# EAGLE board PicoBuck_Panel_v12 (EAGLE 7.4.0), part 1 of 3
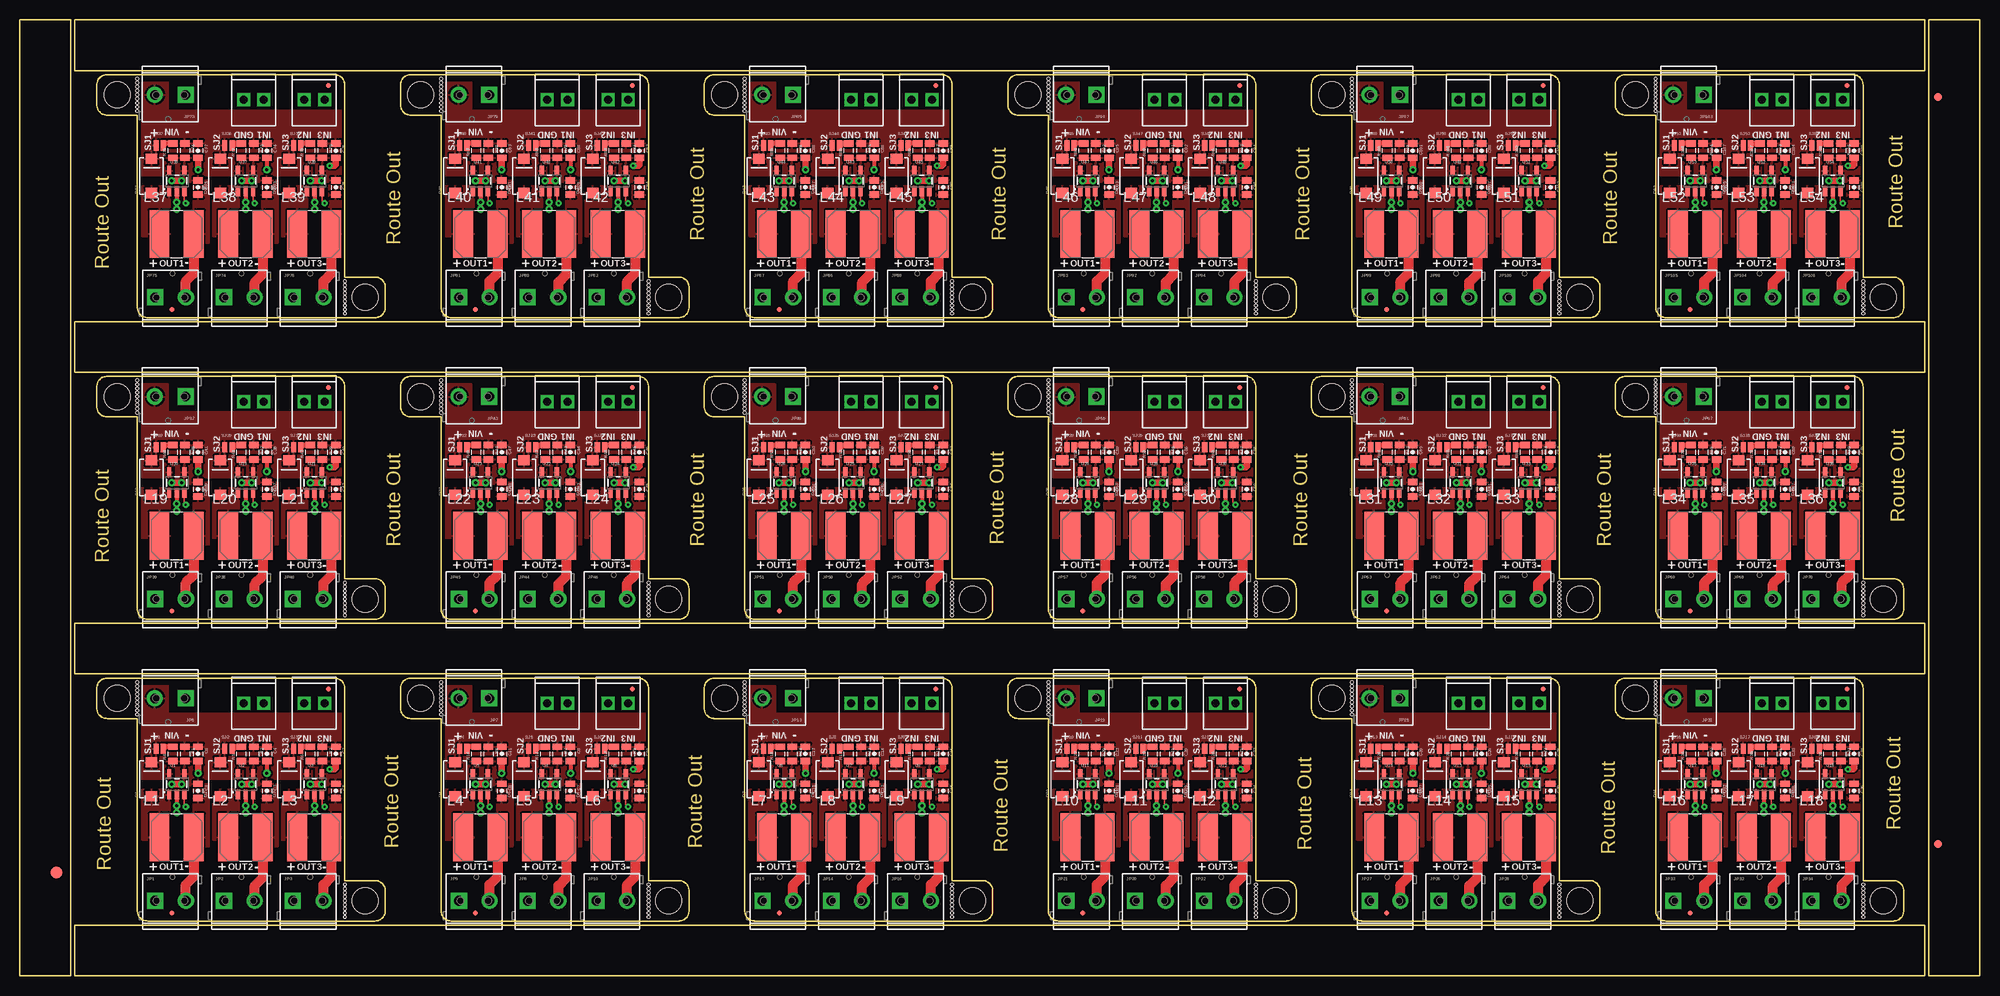
[diagram p0: board, top side]
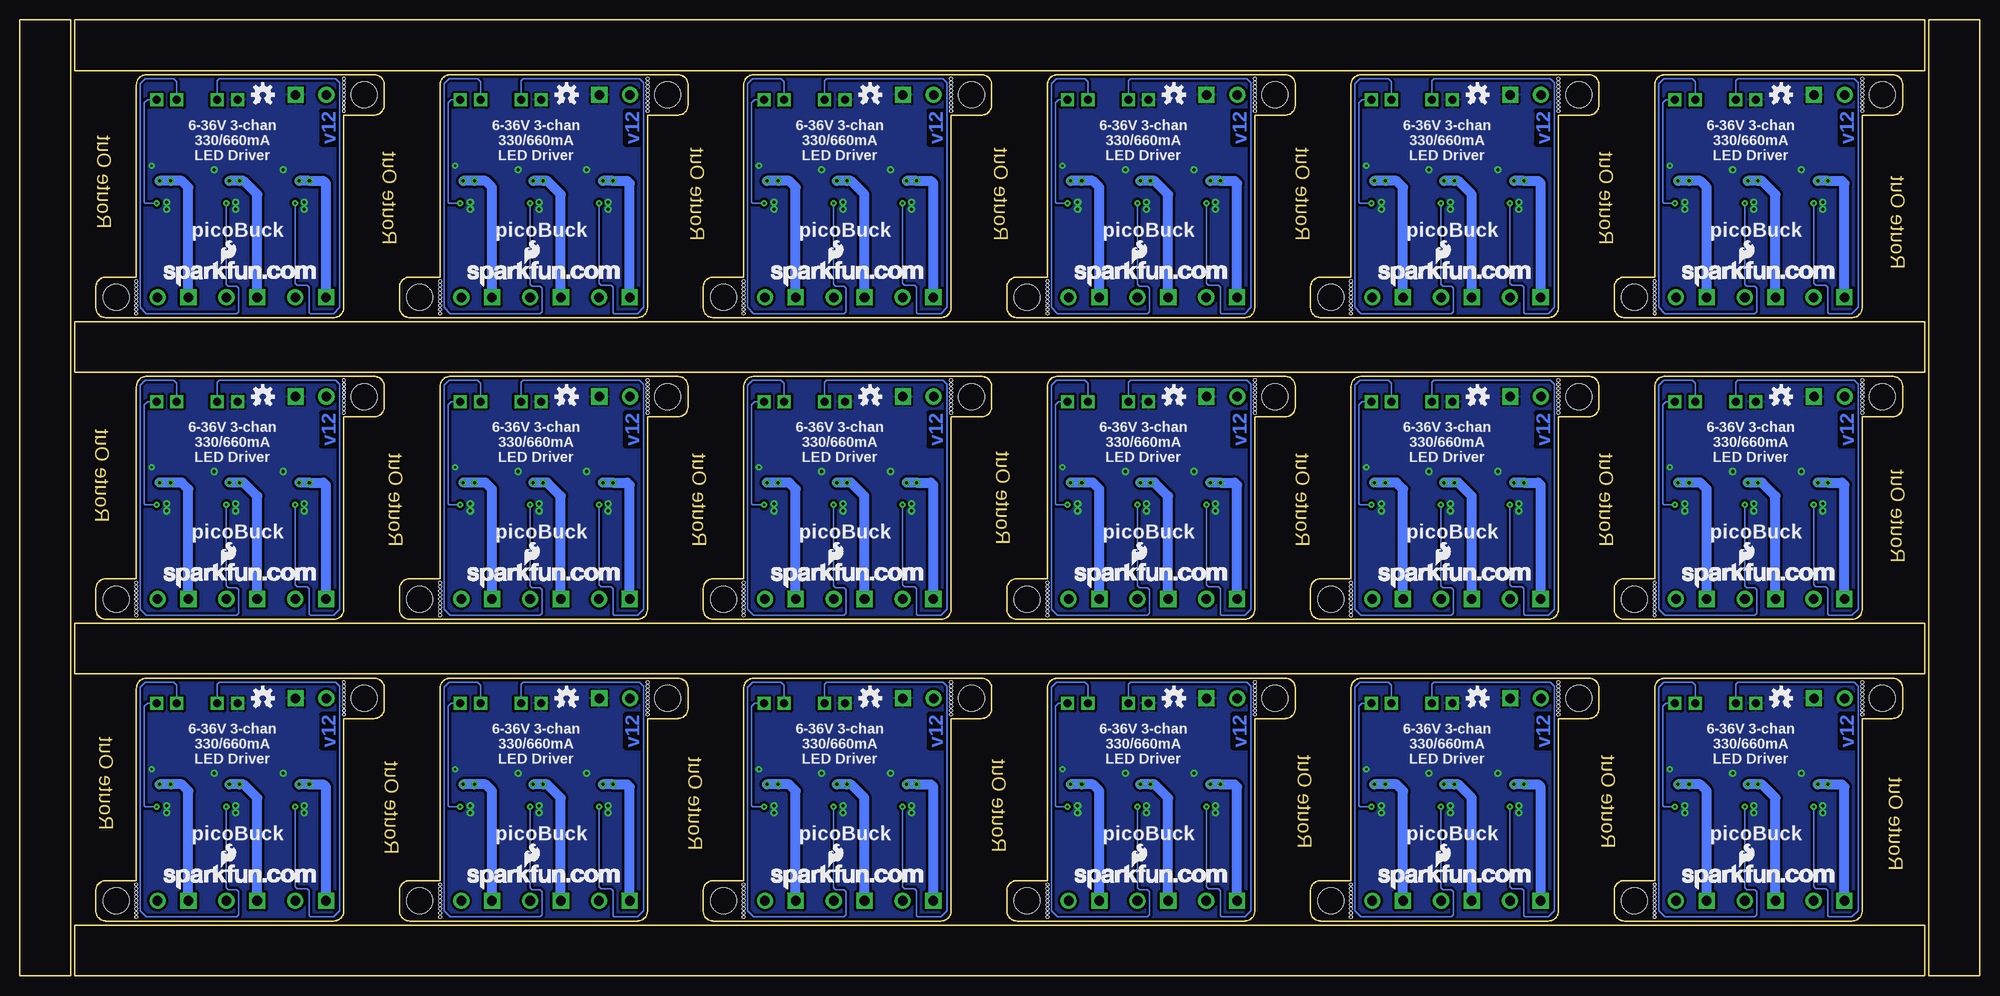
[diagram p1: board, bottom side, seen from below]

Size 245.87 x 119.89 mm. Coordinates in mm from the lower left corner, seen from the top.
Outline: 288 segments
Copper layers (1*16): Top 0.035mm / dielectric 1.5mm / Bottom 0.035mm
Design rules "SparkFun-2-layer": minimum track width 7mil, minimum drill 15mil, track to track 8mil, track to pad 8mil, pad to pad 8mil, via to via 8mil, smd to smd 8mil, copper to edge 8mil, drill to drill 8mil, minimum pad ring 12mil, minimum via ring 10mil, stop-mask expansion 4mil, vias tented up to drill 20mil, thermal gap 10mil
Net classes: 0 default: width 0.254 mm; 1 power: width 0.508 mm
Holes 0.38 mm at 40.77,11.43 40.77,10.92 40.77,10.41 40.77,9.91 40.77,9.4 40.77,8.89 40.77,8.38 40.77,7.87 40.77,7.37 14.73,36.83 14.73,36.32 14.73,35.81 14.73,35.31 14.73,34.8 14.73,34.29 14.73,33.78 14.73,33.27 14.73,32.77 78.87,11.43 78.87,10.92 78.87,10.41 78.87,9.91 78.87,9.4 78.87,8.89 78.87,8.38 78.87,7.87 78.87,7.37 52.83,36.83 52.83,36.32 52.83,35.81 52.83,35.31 52.83,34.8 52.83,34.29 52.83,33.78 52.83,33.27 52.83,32.77 116.97,11.43 116.97,10.92 116.97,10.41 116.97,9.91 116.97,9.4 116.97,8.89 116.97,8.38 116.97,7.87 116.97,7.37 90.93,36.83 90.93,36.32 90.93,35.81 90.93,35.31 90.93,34.8 90.93,34.29 90.93,33.78 90.93,33.27 90.93,32.77 155.07,11.43 155.07,10.92 155.07,10.41 155.07,9.91 155.07,9.4 155.07,8.89 155.07,8.38 155.07,7.87 155.07,7.37 129.03,36.83 129.03,36.32 129.03,35.81 129.03,35.31 129.03,34.8 129.03,34.29 129.03,33.78 129.03,33.27 129.03,32.77 193.17,11.43 193.17,10.92 193.17,10.41 193.17,9.91 193.17,9.4 193.17,8.89 193.17,8.38 193.17,7.87 193.17,7.37 167.13,36.83 167.13,36.32 167.13,35.81 167.13,35.31 167.13,34.8 167.13,34.29 167.13,33.78 167.13,33.27 167.13,32.77 231.27,11.43 231.27,10.92 231.27,10.41 231.27,9.91 231.27,9.4 231.27,8.89 231.27,8.38 231.27,7.87 231.27,7.37 205.23,36.83 205.23,36.32 205.23,35.81 205.23,35.31 205.23,34.8 205.23,34.29 205.23,33.78 205.23,33.27 205.23,32.77 40.77,49.28 40.77,48.77 40.77,48.26 40.77,47.75 40.77,47.24 40.77,46.74 40.77,46.23 40.77,45.72 40.77,45.21 14.73,74.68 14.73,74.17 14.73,73.66 14.73,73.15 14.73,72.64 14.73,72.14 14.73,71.63 14.73,71.12 14.73,70.61 78.87,49.28 78.87,48.77 78.87,48.26 78.87,47.75 78.87,47.24 78.87,46.74 78.87,46.23 78.87,45.72 78.87,45.21 52.83,74.68 52.83,74.17 52.83,73.66 52.83,73.15 52.83,72.64 52.83,72.14 52.83,71.63 52.83,71.12 52.83,70.61 116.97,49.28 116.97,48.77 116.97,48.26 116.97,47.75 116.97,47.24 116.97,46.74 116.97,46.23 116.97,45.72 116.97,45.21 90.93,74.68 90.93,74.17 90.93,73.66 90.93,73.15 90.93,72.64 90.93,72.14 90.93,71.63 90.93,71.12 90.93,70.61 155.07,49.28 155.07,48.77 155.07,48.26 155.07,47.75 155.07,47.24 155.07,46.74 155.07,46.23 155.07,45.72 155.07,45.21 129.03,74.68 129.03,74.17 129.03,73.66 129.03,73.15 129.03,72.64 129.03,72.14 129.03,71.63 129.03,71.12 129.03,70.61 193.17,49.28 193.17,48.77 193.17,48.26 193.17,47.75 193.17,47.24 193.17,46.74 193.17,46.23 193.17,45.72 193.17,45.21 167.13,74.68 167.13,74.17 167.13,73.66 167.13,73.15 167.13,72.64 167.13,72.14 167.13,71.63 167.13,71.12 167.13,70.61 231.27,49.28 231.27,48.77 231.27,48.26 231.27,47.75 231.27,47.24 231.27,46.74 231.27,46.23 231.27,45.72 231.27,45.21 205.23,74.68 205.23,74.17 205.23,73.66 205.23,73.15 205.23,72.64 205.23,72.14 205.23,71.63 205.23,71.12 205.23,70.61 40.77,87.12 40.77,86.61 40.77,86.11 40.77,85.6 40.77,85.09 40.77,84.58 40.77,84.07 40.77,83.57 40.77,83.06 14.73,112.52 14.73,112.01 14.73,111.51 14.73,111 14.73,110.49 14.73,109.98 14.73,109.47 14.73,108.97 14.73,108.46 78.87,87.12 78.87,86.61 78.87,86.11 78.87,85.6 78.87,85.09 78.87,84.58 78.87,84.07 78.87,83.57 78.87,83.06 52.83,112.52 52.83,112.01 52.83,111.51 52.83,111 52.83,110.49 52.83,109.98 52.83,109.47 52.83,108.97 52.83,108.46 116.97,87.12 116.97,86.61 116.97,86.11 116.97,85.6 116.97,85.09 116.97,84.58 116.97,84.07 116.97,83.57 116.97,83.06 90.93,112.52 90.93,112.01 90.93,111.51 90.93,111 90.93,110.49 90.93,109.98 90.93,109.47 90.93,108.97 90.93,108.46 155.07,87.12 155.07,86.61 155.07,86.11 155.07,85.6 155.07,85.09 155.07,84.58 155.07,84.07 155.07,83.57 155.07,83.06 129.03,112.52 129.03,112.01 129.03,111.51 129.03,111 129.03,110.49 129.03,109.98 129.03,109.47 129.03,108.97 129.03,108.46 193.17,87.12 193.17,86.61 193.17,86.11 193.17,85.6 193.17,85.09 193.17,84.58 193.17,84.07 193.17,83.57 193.17,83.06 167.13,112.52 167.13,112.01 167.13,111.51 167.13,111 167.13,110.49 167.13,109.98 167.13,109.47 167.13,108.97 167.13,108.46 231.27,87.12 231.27,86.61 231.27,86.11 231.27,85.6 231.27,85.09 231.27,84.58 231.27,84.07 231.27,83.57 231.27,83.06 205.23,112.52 205.23,112.01 205.23,111.51 205.23,111 205.23,110.49 205.23,109.98 205.23,109.47 205.23,108.97 205.23,108.46

## Footprints (pad centres in the part's own frame; a part is rotated, then mirrored left to right if it is on the bottom)
0805-CAP = smd 0.8 x 1.2: 1 -0.9,0; 2 0.9,0
SMA-DIODE = smd 1.27 x 1.47: A -2.15,0; C 2.15,0
FIDUCIAL-1.5X3 = smd 1.5 x 1.5: 1 0,0
FIDUCIAL-1X2 = smd 1 x 1: 1 0,0
MICRO-FIDUCIAL = smd 0.635 x 0.635: 1 0,0
SCREWTERMINAL-3.5MM-2_LOCK = drill 1.2 pad 2.032 square: 1 -0.178,0 | drill 1.2 pad 2.032: 2 3.678,0
1X02_2.54_SCREWTERM = drill 1.016 square: P1 2.54,0; P2 0,0
SRN6045 = smd 2.5 x 6: 1 -2.175,-0.175; 2 2.125,-0.175
0805 = smd 0.8 x 1.2: 1 -0.9,0; 2 0.9,0
PAD-JUMPER-2-NO_NO_SILK = smd 0.635 x 1.27: 1 -0.45,0; 2 0.45,0
STAND-OFF = hole 3.302: 0,0
SOT23-5 = smd 0.55 x 1.2: 1 -0.95,-1.3; 2 0,-1.3; 3 0.95,-1.3; 4 0.95,1.3; 5 -0.95,1.3

## Placement (x,y rotation side)
C1  1.0uF  [0805-CAP]  22.35,23.18 270 top
C2  2.2uF  [0805-CAP]  39.62,27.81 270 top
C3  1.0uF  [0805-CAP]  30.99,23.18 270 top
C4  2.2uF  [0805-CAP]  30.99,27.81 270 top
C5  1.0uF  [0805-CAP]  39.62,23.18 270 top
C6  2.2uF  [0805-CAP]  22.35,27.81 270 top
C7  1.0uF  [0805-CAP]  69.09,23.18 270 top
C8  2.2uF  [0805-CAP]  69.09,27.81 270 top
C9  1.0uF  [0805-CAP]  60.45,23.18 270 top
C10  2.2uF  [0805-CAP]  77.72,27.81 270 top
C11  2.2uF  [0805-CAP]  60.45,27.81 270 top
C12  1.0uF  [0805-CAP]  77.72,23.18 270 top
C13  1.0uF  [0805-CAP]  107.19,23.18 270 top
C14  2.2uF  [0805-CAP]  107.19,27.81 270 top
C15  1.0uF  [0805-CAP]  98.55,23.18 270 top
C16  2.2uF  [0805-CAP]  115.82,27.81 270 top
C17  2.2uF  [0805-CAP]  98.55,27.81 270 top
C18  1.0uF  [0805-CAP]  115.82,23.18 270 top
C19  1.0uF  [0805-CAP]  145.29,23.18 270 top
C20  2.2uF  [0805-CAP]  145.29,27.81 270 top
C21  1.0uF  [0805-CAP]  136.65,23.18 270 top
C22  2.2uF  [0805-CAP]  153.92,27.81 270 top
C23  2.2uF  [0805-CAP]  136.65,27.81 270 top
C24  1.0uF  [0805-CAP]  153.92,23.18 270 top
C25  1.0uF  [0805-CAP]  183.39,23.18 270 top
C26  2.2uF  [0805-CAP]  183.39,27.81 270 top
C27  1.0uF  [0805-CAP]  174.75,23.18 270 top
C28  2.2uF  [0805-CAP]  192.02,27.81 270 top
C29  2.2uF  [0805-CAP]  174.75,27.81 270 top
C30  1.0uF  [0805-CAP]  192.02,23.18 270 top
C31  1.0uF  [0805-CAP]  221.49,23.18 270 top
C32  2.2uF  [0805-CAP]  221.49,27.81 270 top
C33  1.0uF  [0805-CAP]  212.85,23.18 270 top
C34  2.2uF  [0805-CAP]  230.12,27.81 270 top
C35  2.2uF  [0805-CAP]  212.85,27.81 270 top
C36  1.0uF  [0805-CAP]  230.12,23.18 270 top
C37  1.0uF  [0805-CAP]  30.99,61.02 270 top
C38  2.2uF  [0805-CAP]  30.99,65.66 270 top
C39  1.0uF  [0805-CAP]  22.35,61.02 270 top
C40  2.2uF  [0805-CAP]  39.62,65.66 270 top
C41  2.2uF  [0805-CAP]  22.35,65.66 270 top
C42  1.0uF  [0805-CAP]  39.62,61.02 270 top
C43  1.0uF  [0805-CAP]  69.09,61.02 270 top
C44  2.2uF  [0805-CAP]  69.09,65.66 270 top
C45  1.0uF  [0805-CAP]  60.45,61.02 270 top
C46  2.2uF  [0805-CAP]  77.72,65.66 270 top
C47  2.2uF  [0805-CAP]  60.45,65.66 270 top
C48  1.0uF  [0805-CAP]  77.72,61.02 270 top
C49  1.0uF  [0805-CAP]  107.19,61.02 270 top
C50  2.2uF  [0805-CAP]  107.19,65.66 270 top
C51  1.0uF  [0805-CAP]  98.55,61.02 270 top
C52  2.2uF  [0805-CAP]  115.82,65.66 270 top
C53  2.2uF  [0805-CAP]  98.55,65.66 270 top
C54  1.0uF  [0805-CAP]  115.82,61.02 270 top
C55  1.0uF  [0805-CAP]  145.29,61.02 270 top
C56  2.2uF  [0805-CAP]  145.29,65.66 270 top
C57  1.0uF  [0805-CAP]  136.65,61.02 270 top
C58  2.2uF  [0805-CAP]  153.92,65.66 270 top
C59  2.2uF  [0805-CAP]  136.65,65.66 270 top
C60  1.0uF  [0805-CAP]  153.92,61.02 270 top
C61  1.0uF  [0805-CAP]  183.39,61.02 270 top
C62  2.2uF  [0805-CAP]  183.39,65.66 270 top
C63  1.0uF  [0805-CAP]  174.75,61.02 270 top
C64  2.2uF  [0805-CAP]  192.02,65.66 270 top
C65  2.2uF  [0805-CAP]  174.75,65.66 270 top
C66  1.0uF  [0805-CAP]  192.02,61.02 270 top
C67  1.0uF  [0805-CAP]  221.49,61.02 270 top
C68  2.2uF  [0805-CAP]  221.49,65.66 270 top
C69  1.0uF  [0805-CAP]  212.85,61.02 270 top
C70  2.2uF  [0805-CAP]  230.12,65.66 270 top
C71  2.2uF  [0805-CAP]  212.85,65.66 270 top
C72  1.0uF  [0805-CAP]  230.12,61.02 270 top
C73  1.0uF  [0805-CAP]  30.99,98.87 270 top
C74  2.2uF  [0805-CAP]  30.99,103.5 270 top
C75  1.0uF  [0805-CAP]  22.35,98.87 270 top
C76  2.2uF  [0805-CAP]  39.62,103.5 270 top
C77  2.2uF  [0805-CAP]  22.35,103.5 270 top
C78  1.0uF  [0805-CAP]  39.62,98.87 270 top
C79  1.0uF  [0805-CAP]  69.09,98.87 270 top
C80  2.2uF  [0805-CAP]  69.09,103.5 270 top
C81  1.0uF  [0805-CAP]  60.45,98.87 270 top
C82  2.2uF  [0805-CAP]  77.72,103.5 270 top
C83  2.2uF  [0805-CAP]  60.45,103.5 270 top
C84  1.0uF  [0805-CAP]  77.72,98.87 270 top
C85  1.0uF  [0805-CAP]  107.19,98.87 270 top
C86  2.2uF  [0805-CAP]  107.19,103.5 270 top
C87  1.0uF  [0805-CAP]  98.55,98.87 270 top
C88  2.2uF  [0805-CAP]  115.82,103.5 270 top
C89  2.2uF  [0805-CAP]  98.55,103.5 270 top
C90  1.0uF  [0805-CAP]  115.82,98.87 270 top
C91  1.0uF  [0805-CAP]  145.29,98.87 270 top
C92  2.2uF  [0805-CAP]  145.29,103.5 270 top
C93  1.0uF  [0805-CAP]  136.65,98.87 270 top
C94  2.2uF  [0805-CAP]  153.92,103.5 270 top
C95  2.2uF  [0805-CAP]  136.65,103.5 270 top
C96  1.0uF  [0805-CAP]  153.92,98.87 270 top
C97  1.0uF  [0805-CAP]  183.39,98.87 270 top
C98  2.2uF  [0805-CAP]  183.39,103.5 270 top
C99  1.0uF  [0805-CAP]  174.75,98.87 270 top
C100  2.2uF  [0805-CAP]  192.02,103.5 270 top
C101  2.2uF  [0805-CAP]  174.75,103.5 270 top
C102  1.0uF  [0805-CAP]  192.02,98.87 270 top
C103  1.0uF  [0805-CAP]  221.49,98.87 270 top
C104  2.2uF  [0805-CAP]  221.49,103.5 270 top
C105  1.0uF  [0805-CAP]  212.85,98.87 270 top
C106  2.2uF  [0805-CAP]  230.12,103.5 270 top
C107  2.2uF  [0805-CAP]  212.85,103.5 270 top
C108  1.0uF  [0805-CAP]  230.12,98.87 270 top
D1  MBRA140  [SMA-DIODE]  16.51,24.64 90 top
D2  MBRA140  [SMA-DIODE]  25.15,24.64 90 top
D3  MBRA140  [SMA-DIODE]  33.78,24.64 90 top
D4  MBRA140  [SMA-DIODE]  54.61,24.64 90 top
D5  MBRA140  [SMA-DIODE]  63.25,24.64 90 top
D6  MBRA140  [SMA-DIODE]  71.88,24.64 90 top
D7  MBRA140  [SMA-DIODE]  92.71,24.64 90 top
D8  MBRA140  [SMA-DIODE]  101.35,24.64 90 top
D9  MBRA140  [SMA-DIODE]  109.98,24.64 90 top
D10  MBRA140  [SMA-DIODE]  130.81,24.64 90 top
D11  MBRA140  [SMA-DIODE]  139.45,24.64 90 top
D12  MBRA140  [SMA-DIODE]  148.08,24.64 90 top
D13  MBRA140  [SMA-DIODE]  168.91,24.64 90 top
D14  MBRA140  [SMA-DIODE]  177.55,24.64 90 top
D15  MBRA140  [SMA-DIODE]  186.18,24.64 90 top
D16  MBRA140  [SMA-DIODE]  207.01,24.64 90 top
D17  MBRA140  [SMA-DIODE]  215.65,24.64 90 top
D18  MBRA140  [SMA-DIODE]  224.28,24.64 90 top
D19  MBRA140  [SMA-DIODE]  16.51,62.48 90 top
D20  MBRA140  [SMA-DIODE]  25.15,62.48 90 top
D21  MBRA140  [SMA-DIODE]  33.78,62.48 90 top
D22  MBRA140  [SMA-DIODE]  54.61,62.48 90 top
D23  MBRA140  [SMA-DIODE]  63.25,62.48 90 top
D24  MBRA140  [SMA-DIODE]  71.88,62.48 90 top
D25  MBRA140  [SMA-DIODE]  92.71,62.48 90 top
D26  MBRA140  [SMA-DIODE]  101.35,62.48 90 top
D27  MBRA140  [SMA-DIODE]  109.98,62.48 90 top
D28  MBRA140  [SMA-DIODE]  130.81,62.48 90 top
D29  MBRA140  [SMA-DIODE]  139.45,62.48 90 top
D30  MBRA140  [SMA-DIODE]  148.08,62.48 90 top
D31  MBRA140  [SMA-DIODE]  168.91,62.48 90 top
D32  MBRA140  [SMA-DIODE]  177.55,62.48 90 top
D33  MBRA140  [SMA-DIODE]  186.18,62.48 90 top
D34  MBRA140  [SMA-DIODE]  207.01,62.48 90 top
D35  MBRA140  [SMA-DIODE]  215.65,62.48 90 top
D36  MBRA140  [SMA-DIODE]  224.28,62.48 90 top
D37  MBRA140  [SMA-DIODE]  16.51,100.33 90 top
D38  MBRA140  [SMA-DIODE]  25.15,100.33 90 top
D39  MBRA140  [SMA-DIODE]  33.78,100.33 90 top
D40  MBRA140  [SMA-DIODE]  54.61,100.33 90 top
D41  MBRA140  [SMA-DIODE]  63.25,100.33 90 top
D42  MBRA140  [SMA-DIODE]  71.88,100.33 90 top
D43  MBRA140  [SMA-DIODE]  92.71,100.33 90 top
D44  MBRA140  [SMA-DIODE]  101.35,100.33 90 top
D45  MBRA140  [SMA-DIODE]  109.98,100.33 90 top
D46  MBRA140  [SMA-DIODE]  130.81,100.33 90 top
D47  MBRA140  [SMA-DIODE]  139.45,100.33 90 top
D48  MBRA140  [SMA-DIODE]  148.08,100.33 90 top
D49  MBRA140  [SMA-DIODE]  168.91,100.33 90 top
D50  MBRA140  [SMA-DIODE]  177.55,100.33 90 top
D51  MBRA140  [SMA-DIODE]  186.18,100.33 90 top
D52  MBRA140  [SMA-DIODE]  207.01,100.33 90 top
D53  MBRA140  [SMA-DIODE]  215.65,100.33 90 top
D54  MBRA140  [SMA-DIODE]  224.28,100.33 90 top
E$1  [FIDUCIAL-1.5X3]  4.57,12.95 0 top
E$9  [FIDUCIAL-1X2]  240.66,16.51 0 top
E$10  [FIDUCIAL-1X2]  240.66,110.24 180 top
FID1  FIDUCIALUFIDUCIAL  [MICRO-FIDUCIAL]  19.05,7.87 0 top
FID2  FIDUCIALUFIDUCIAL  [MICRO-FIDUCIAL]  38.73,35.94 0 top
FID3  FIDUCIALUFIDUCIAL  [MICRO-FIDUCIAL]  57.15,7.87 0 top
FID4  FIDUCIALUFIDUCIAL  [MICRO-FIDUCIAL]  76.83,35.94 0 top
FID5  FIDUCIALUFIDUCIAL  [MICRO-FIDUCIAL]  95.25,7.87 0 top
FID6  FIDUCIALUFIDUCIAL  [MICRO-FIDUCIAL]  114.94,35.94 0 top
FID7  FIDUCIALUFIDUCIAL  [MICRO-FIDUCIAL]  133.35,7.87 0 top
FID8  FIDUCIALUFIDUCIAL  [MICRO-FIDUCIAL]  153.03,35.94 0 top
FID9  FIDUCIALUFIDUCIAL  [MICRO-FIDUCIAL]  171.45,7.87 0 top
FID10  FIDUCIALUFIDUCIAL  [MICRO-FIDUCIAL]  191.13,35.94 0 top
FID11  FIDUCIALUFIDUCIAL  [MICRO-FIDUCIAL]  209.55,7.87 0 top
FID12  FIDUCIALUFIDUCIAL  [MICRO-FIDUCIAL]  229.24,35.94 0 top
FID13  FIDUCIALUFIDUCIAL  [MICRO-FIDUCIAL]  19.05,45.72 0 top
FID14  FIDUCIALUFIDUCIAL  [MICRO-FIDUCIAL]  38.73,73.79 0 top
FID15  FIDUCIALUFIDUCIAL  [MICRO-FIDUCIAL]  57.15,45.72 0 top
FID16  FIDUCIALUFIDUCIAL  [MICRO-FIDUCIAL]  76.83,73.79 0 top
FID17  FIDUCIALUFIDUCIAL  [MICRO-FIDUCIAL]  95.25,45.72 0 top
FID18  FIDUCIALUFIDUCIAL  [MICRO-FIDUCIAL]  114.94,73.79 0 top
FID19  FIDUCIALUFIDUCIAL  [MICRO-FIDUCIAL]  133.35,45.72 0 top
FID20  FIDUCIALUFIDUCIAL  [MICRO-FIDUCIAL]  153.03,73.79 0 top
FID21  FIDUCIALUFIDUCIAL  [MICRO-FIDUCIAL]  171.45,45.72 0 top
FID22  FIDUCIALUFIDUCIAL  [MICRO-FIDUCIAL]  191.13,73.79 0 top
FID23  FIDUCIALUFIDUCIAL  [MICRO-FIDUCIAL]  209.55,45.72 0 top
FID24  FIDUCIALUFIDUCIAL  [MICRO-FIDUCIAL]  229.24,73.79 0 top
FID25  FIDUCIALUFIDUCIAL  [MICRO-FIDUCIAL]  19.05,83.57 0 top
FID26  FIDUCIALUFIDUCIAL  [MICRO-FIDUCIAL]  38.73,111.63 0 top
FID27  FIDUCIALUFIDUCIAL  [MICRO-FIDUCIAL]  57.15,83.57 0 top
FID28  FIDUCIALUFIDUCIAL  [MICRO-FIDUCIAL]  76.83,111.63 0 top
FID29  FIDUCIALUFIDUCIAL  [MICRO-FIDUCIAL]  95.25,83.57 0 top
FID30  FIDUCIALUFIDUCIAL  [MICRO-FIDUCIAL]  114.94,111.63 0 top
FID31  FIDUCIALUFIDUCIAL  [MICRO-FIDUCIAL]  133.35,83.57 0 top
FID32  FIDUCIALUFIDUCIAL  [MICRO-FIDUCIAL]  153.03,111.63 0 top
FID33  FIDUCIALUFIDUCIAL  [MICRO-FIDUCIAL]  171.45,83.57 0 top
FID34  FIDUCIALUFIDUCIAL  [MICRO-FIDUCIAL]  191.13,111.63 0 top
FID35  FIDUCIALUFIDUCIAL  [MICRO-FIDUCIAL]  209.55,83.57 0 top
FID36  FIDUCIALUFIDUCIAL  [MICRO-FIDUCIAL]  229.24,111.63 0 top
JP1  [SCREWTERMINAL-3.5MM-2_LOCK]  17.14,9.4 0 top
JP2  [SCREWTERMINAL-3.5MM-2_LOCK]  25.78,9.4 0 top
JP3  [SCREWTERMINAL-3.5MM-2_LOCK]  34.42,9.4 0 top
JP4  M022.54MM_SCREWTERM  [1X02_2.54_SCREWTERM]  35.69,34.16 0 top
JP5  M022.54MM_SCREWTERM  [1X02_2.54_SCREWTERM]  28.07,34.16 0 top
JP6  [SCREWTERMINAL-3.5MM-2_LOCK]  20.61,34.8 180 top
JP7  [SCREWTERMINAL-3.5MM-2_LOCK]  58.71,34.8 180 top
JP8  [SCREWTERMINAL-3.5MM-2_LOCK]  63.88,9.4 0 top
JP9  [SCREWTERMINAL-3.5MM-2_LOCK]  55.24,9.4 0 top
JP10  [SCREWTERMINAL-3.5MM-2_LOCK]  72.52,9.4 0 top
JP11  M022.54MM_SCREWTERM  [1X02_2.54_SCREWTERM]  73.79,34.16 0 top
JP12  M022.54MM_SCREWTERM  [1X02_2.54_SCREWTERM]  66.17,34.16 0 top
JP13  [SCREWTERMINAL-3.5MM-2_LOCK]  96.81,34.8 180 top
JP14  [SCREWTERMINAL-3.5MM-2_LOCK]  101.98,9.4 0 top
JP15  [SCREWTERMINAL-3.5MM-2_LOCK]  93.34,9.4 0 top
JP16  [SCREWTERMINAL-3.5MM-2_LOCK]  110.62,9.4 0 top
JP17  M022.54MM_SCREWTERM  [1X02_2.54_SCREWTERM]  111.89,34.16 0 top
JP18  M022.54MM_SCREWTERM  [1X02_2.54_SCREWTERM]  104.27,34.16 0 top
JP19  [SCREWTERMINAL-3.5MM-2_LOCK]  134.91,34.8 180 top
JP20  [SCREWTERMINAL-3.5MM-2_LOCK]  140.08,9.4 0 top
JP21  [SCREWTERMINAL-3.5MM-2_LOCK]  131.44,9.4 0 top
JP22  [SCREWTERMINAL-3.5MM-2_LOCK]  148.72,9.4 0 top
JP23  M022.54MM_SCREWTERM  [1X02_2.54_SCREWTERM]  149.99,34.16 0 top
JP24  M022.54MM_SCREWTERM  [1X02_2.54_SCREWTERM]  142.37,34.16 0 top
JP25  [SCREWTERMINAL-3.5MM-2_LOCK]  173.01,34.8 180 top
JP26  [SCREWTERMINAL-3.5MM-2_LOCK]  178.18,9.4 0 top
JP27  [SCREWTERMINAL-3.5MM-2_LOCK]  169.54,9.4 0 top
JP28  [SCREWTERMINAL-3.5MM-2_LOCK]  186.82,9.4 0 top
JP29  M022.54MM_SCREWTERM  [1X02_2.54_SCREWTERM]  188.09,34.16 0 top
JP30  M022.54MM_SCREWTERM  [1X02_2.54_SCREWTERM]  180.47,34.16 0 top
JP31  [SCREWTERMINAL-3.5MM-2_LOCK]  211.11,34.8 180 top
JP32  [SCREWTERMINAL-3.5MM-2_LOCK]  216.28,9.4 0 top
JP33  [SCREWTERMINAL-3.5MM-2_LOCK]  207.65,9.4 0 top
JP34  [SCREWTERMINAL-3.5MM-2_LOCK]  224.92,9.4 0 top
JP35  M022.54MM_SCREWTERM  [1X02_2.54_SCREWTERM]  226.19,34.16 0 top
JP36  M022.54MM_SCREWTERM  [1X02_2.54_SCREWTERM]  218.57,34.16 0 top
JP37  [SCREWTERMINAL-3.5MM-2_LOCK]  20.61,72.64 180 top
JP38  [SCREWTERMINAL-3.5MM-2_LOCK]  25.78,47.24 0 top
JP39  [SCREWTERMINAL-3.5MM-2_LOCK]  17.14,47.24 0 top
JP40  [SCREWTERMINAL-3.5MM-2_LOCK]  34.42,47.24 0 top
JP41  M022.54MM_SCREWTERM  [1X02_2.54_SCREWTERM]  35.69,72.01 0 top
JP42  M022.54MM_SCREWTERM  [1X02_2.54_SCREWTERM]  28.07,72.01 0 top
JP43  [SCREWTERMINAL-3.5MM-2_LOCK]  58.71,72.64 180 top
JP44  [SCREWTERMINAL-3.5MM-2_LOCK]  63.88,47.24 0 top
JP45  [SCREWTERMINAL-3.5MM-2_LOCK]  55.24,47.24 0 top
JP46  [SCREWTERMINAL-3.5MM-2_LOCK]  72.52,47.24 0 top
JP47  M022.54MM_SCREWTERM  [1X02_2.54_SCREWTERM]  73.79,72.01 0 top
JP48  M022.54MM_SCREWTERM  [1X02_2.54_SCREWTERM]  66.17,72.01 0 top
JP49  [SCREWTERMINAL-3.5MM-2_LOCK]  96.81,72.64 180 top
JP50  [SCREWTERMINAL-3.5MM-2_LOCK]  101.98,47.24 0 top
JP51  [SCREWTERMINAL-3.5MM-2_LOCK]  93.34,47.24 0 top
JP52  [SCREWTERMINAL-3.5MM-2_LOCK]  110.62,47.24 0 top
JP53  M022.54MM_SCREWTERM  [1X02_2.54_SCREWTERM]  111.89,72.01 0 top
JP54  M022.54MM_SCREWTERM  [1X02_2.54_SCREWTERM]  104.27,72.01 0 top
JP55  [SCREWTERMINAL-3.5MM-2_LOCK]  134.91,72.64 180 top
JP56  [SCREWTERMINAL-3.5MM-2_LOCK]  140.08,47.24 0 top
JP57  [SCREWTERMINAL-3.5MM-2_LOCK]  131.44,47.24 0 top
JP58  [SCREWTERMINAL-3.5MM-2_LOCK]  148.72,47.24 0 top
JP59  M022.54MM_SCREWTERM  [1X02_2.54_SCREWTERM]  149.99,72.01 0 top
JP60  M022.54MM_SCREWTERM  [1X02_2.54_SCREWTERM]  142.37,72.01 0 top
JP61  [SCREWTERMINAL-3.5MM-2_LOCK]  173.01,72.64 180 top
JP62  [SCREWTERMINAL-3.5MM-2_LOCK]  178.18,47.24 0 top
JP63  [SCREWTERMINAL-3.5MM-2_LOCK]  169.54,47.24 0 top
JP64  [SCREWTERMINAL-3.5MM-2_LOCK]  186.82,47.24 0 top
JP65  M022.54MM_SCREWTERM  [1X02_2.54_SCREWTERM]  188.09,72.01 0 top
JP66  M022.54MM_SCREWTERM  [1X02_2.54_SCREWTERM]  180.47,72.01 0 top
JP67  [SCREWTERMINAL-3.5MM-2_LOCK]  211.11,72.64 180 top
JP68  [SCREWTERMINAL-3.5MM-2_LOCK]  216.28,47.24 0 top
JP69  [SCREWTERMINAL-3.5MM-2_LOCK]  207.65,47.24 0 top
JP70  [SCREWTERMINAL-3.5MM-2_LOCK]  224.92,47.24 0 top
JP71  M022.54MM_SCREWTERM  [1X02_2.54_SCREWTERM]  226.19,72.01 0 top
JP72  M022.54MM_SCREWTERM  [1X02_2.54_SCREWTERM]  218.57,72.01 0 top
JP73  [SCREWTERMINAL-3.5MM-2_LOCK]  20.61,110.49 180 top
JP74  [SCREWTERMINAL-3.5MM-2_LOCK]  25.78,85.09 0 top
JP75  [SCREWTERMINAL-3.5MM-2_LOCK]  17.14,85.09 0 top
JP76  [SCREWTERMINAL-3.5MM-2_LOCK]  34.42,85.09 0 top
JP77  M022.54MM_SCREWTERM  [1X02_2.54_SCREWTERM]  35.69,109.86 0 top
JP78  M022.54MM_SCREWTERM  [1X02_2.54_SCREWTERM]  28.07,109.86 0 top
JP79  [SCREWTERMINAL-3.5MM-2_LOCK]  58.71,110.49 180 top
JP80  [SCREWTERMINAL-3.5MM-2_LOCK]  63.88,85.09 0 top
JP81  [SCREWTERMINAL-3.5MM-2_LOCK]  55.24,85.09 0 top
JP82  [SCREWTERMINAL-3.5MM-2_LOCK]  72.52,85.09 0 top
JP83  M022.54MM_SCREWTERM  [1X02_2.54_SCREWTERM]  73.79,109.86 0 top
JP84  M022.54MM_SCREWTERM  [1X02_2.54_SCREWTERM]  66.17,109.86 0 top
JP85  [SCREWTERMINAL-3.5MM-2_LOCK]  96.81,110.49 180 top
JP86  [SCREWTERMINAL-3.5MM-2_LOCK]  101.98,85.09 0 top
JP87  [SCREWTERMINAL-3.5MM-2_LOCK]  93.34,85.09 0 top
JP88  [SCREWTERMINAL-3.5MM-2_LOCK]  110.62,85.09 0 top
JP89  M022.54MM_SCREWTERM  [1X02_2.54_SCREWTERM]  111.89,109.86 0 top
JP90  M022.54MM_SCREWTERM  [1X02_2.54_SCREWTERM]  104.27,109.86 0 top
JP91  [SCREWTERMINAL-3.5MM-2_LOCK]  134.91,110.49 180 top
JP92  [SCREWTERMINAL-3.5MM-2_LOCK]  140.08,85.09 0 top
JP93  [SCREWTERMINAL-3.5MM-2_LOCK]  131.44,85.09 0 top
JP94  [SCREWTERMINAL-3.5MM-2_LOCK]  148.72,85.09 0 top
JP95  M022.54MM_SCREWTERM  [1X02_2.54_SCREWTERM]  149.99,109.86 0 top
JP96  M022.54MM_SCREWTERM  [1X02_2.54_SCREWTERM]  142.37,109.86 0 top
JP97  [SCREWTERMINAL-3.5MM-2_LOCK]  173.01,110.49 180 top
JP98  [SCREWTERMINAL-3.5MM-2_LOCK]  178.18,85.09 0 top
JP99  [SCREWTERMINAL-3.5MM-2_LOCK]  169.54,85.09 0 top
JP100  [SCREWTERMINAL-3.5MM-2_LOCK]  186.82,85.09 0 top
JP101  M022.54MM_SCREWTERM  [1X02_2.54_SCREWTERM]  188.09,109.86 0 top
JP102  M022.54MM_SCREWTERM  [1X02_2.54_SCREWTERM]  180.47,109.86 0 top
JP103  [SCREWTERMINAL-3.5MM-2_LOCK]  211.11,110.49 180 top
JP104  [SCREWTERMINAL-3.5MM-2_LOCK]  216.28,85.09 0 top
JP105  [SCREWTERMINAL-3.5MM-2_LOCK]  207.65,85.09 0 top
JP106  [SCREWTERMINAL-3.5MM-2_LOCK]  224.92,85.09 0 top
JP107  M022.54MM_SCREWTERM  [1X02_2.54_SCREWTERM]  226.19,109.86 0 top
JP108  M022.54MM_SCREWTERM  [1X02_2.54_SCREWTERM]  218.57,109.86 0 top
L1  33uH  [SRN6045]  19.68,17.53 0 top
L2  33uH  [SRN6045]  28.32,17.53 0 top
L3  33uH  [SRN6045]  36.96,17.53 0 top
L4  33uH  [SRN6045]  57.78,17.53 0 top
L5  33uH  [SRN6045]  66.42,17.53 0 top
L6  33uH  [SRN6045]  75.06,17.53 0 top
L7  33uH  [SRN6045]  95.89,17.53 0 top
L8  33uH  [SRN6045]  104.52,17.53 0 top
L9  33uH  [SRN6045]  113.16,17.53 0 top
L10  33uH  [SRN6045]  133.99,17.53 0 top
L11  33uH  [SRN6045]  142.62,17.53 0 top
L12  33uH  [SRN6045]  151.26,17.53 0 top
L13  33uH  [SRN6045]  172.09,17.53 0 top
L14  33uH  [SRN6045]  180.72,17.53 0 top
L15  33uH  [SRN6045]  189.36,17.53 0 top
L16  33uH  [SRN6045]  210.19,17.53 0 top
L17  33uH  [SRN6045]  218.82,17.53 0 top
L18  33uH  [SRN6045]  227.46,17.53 0 top
L19  33uH  [SRN6045]  19.68,55.37 0 top
L20  33uH  [SRN6045]  28.32,55.37 0 top
L21  33uH  [SRN6045]  36.96,55.37 0 top
L22  33uH  [SRN6045]  57.78,55.37 0 top
L23  33uH  [SRN6045]  66.42,55.37 0 top
L24  33uH  [SRN6045]  75.06,55.37 0 top
L25  33uH  [SRN6045]  95.89,55.37 0 top
L26  33uH  [SRN6045]  104.52,55.37 0 top
L27  33uH  [SRN6045]  113.16,55.37 0 top
L28  33uH  [SRN6045]  133.99,55.37 0 top
L29  33uH  [SRN6045]  142.62,55.37 0 top
L30  33uH  [SRN6045]  151.26,55.37 0 top
L31  33uH  [SRN6045]  172.09,55.37 0 top
L32  33uH  [SRN6045]  180.72,55.37 0 top
L33  33uH  [SRN6045]  189.36,55.37 0 top
L34  33uH  [SRN6045]  210.19,55.37 0 top
L35  33uH  [SRN6045]  218.82,55.37 0 top
L36  33uH  [SRN6045]  227.46,55.37 0 top
L37  33uH  [SRN6045]  19.68,93.22 0 top
L38  33uH  [SRN6045]  28.32,93.22 0 top
L39  33uH  [SRN6045]  36.96,93.22 0 top
L40  33uH  [SRN6045]  57.78,93.22 0 top
L41  33uH  [SRN6045]  66.42,93.22 0 top
L42  33uH  [SRN6045]  75.06,93.22 0 top
L43  33uH  [SRN6045]  95.89,93.22 0 top
L44  33uH  [SRN6045]  104.52,93.22 0 top
L45  33uH  [SRN6045]  113.16,93.22 0 top
L46  33uH  [SRN6045]  133.99,93.22 0 top
L47  33uH  [SRN6045]  142.62,93.22 0 top
L48  33uH  [SRN6045]  151.26,93.22 0 top
L49  33uH  [SRN6045]  172.09,93.22 0 top
L50  33uH  [SRN6045]  180.72,93.22 0 top
L51  33uH  [SRN6045]  189.36,93.22 0 top
L52  33uH  [SRN6045]  210.19,93.22 0 top
L53  33uH  [SRN6045]  218.82,93.22 0 top
L54  33uH  [SRN6045]  227.46,93.22 0 top
LOGO1  OSHW-LOGOS  [OSHW-LOGO-S]  24.89,34.8 0 bottom
LOGO2  LOGO-SFENEW  [SFE-NEW-WEBLOGO]  37.34,10.79 0 bottom
LOGO3  OSHW-LOGOS  [OSHW-LOGO-S]  62.99,34.8 0 bottom
LOGO4  LOGO-SFENEW  [SFE-NEW-WEBLOGO]  75.44,10.79 0 bottom
LOGO5  OSHW-LOGOS  [OSHW-LOGO-S]  101.09,34.8 0 bottom
LOGO6  LOGO-SFENEW  [SFE-NEW-WEBLOGO]  113.54,10.79 0 bottom
LOGO7  OSHW-LOGOS  [OSHW-LOGO-S]  139.19,34.8 0 bottom
LOGO8  LOGO-SFENEW  [SFE-NEW-WEBLOGO]  151.64,10.79 0 bottom
LOGO9  OSHW-LOGOS  [OSHW-LOGO-S]  177.29,34.8 0 bottom
LOGO10  LOGO-SFENEW  [SFE-NEW-WEBLOGO]  189.74,10.79 0 bottom
LOGO11  OSHW-LOGOS  [OSHW-LOGO-S]  215.39,34.8 0 bottom
LOGO12  LOGO-SFENEW  [SFE-NEW-WEBLOGO]  227.84,10.79 0 bottom
LOGO13  OSHW-LOGOS  [OSHW-LOGO-S]  24.89,72.64 0 bottom
LOGO14  LOGO-SFENEW  [SFE-NEW-WEBLOGO]  37.34,48.64 0 bottom
LOGO15  OSHW-LOGOS  [OSHW-LOGO-S]  62.99,72.64 0 bottom
LOGO16  LOGO-SFENEW  [SFE-NEW-WEBLOGO]  75.44,48.64 0 bottom
LOGO17  OSHW-LOGOS  [OSHW-LOGO-S]  101.09,72.64 0 bottom
LOGO18  LOGO-SFENEW  [SFE-NEW-WEBLOGO]  113.54,48.64 0 bottom
LOGO19  OSHW-LOGOS  [OSHW-LOGO-S]  139.19,72.64 0 bottom
LOGO20  LOGO-SFENEW  [SFE-NEW-WEBLOGO]  151.64,48.64 0 bottom
LOGO21  OSHW-LOGOS  [OSHW-LOGO-S]  177.29,72.64 0 bottom
LOGO22  LOGO-SFENEW  [SFE-NEW-WEBLOGO]  189.74,48.64 0 bottom
LOGO23  OSHW-LOGOS  [OSHW-LOGO-S]  215.39,72.64 0 bottom
LOGO24  LOGO-SFENEW  [SFE-NEW-WEBLOGO]  227.84,48.64 0 bottom
LOGO25  OSHW-LOGOS  [OSHW-LOGO-S]  24.89,110.49 0 bottom
LOGO26  LOGO-SFENEW  [SFE-NEW-WEBLOGO]  37.34,86.49 0 bottom
LOGO27  OSHW-LOGOS  [OSHW-LOGO-S]  62.99,110.49 0 bottom
LOGO28  LOGO-SFENEW  [SFE-NEW-WEBLOGO]  75.44,86.49 0 bottom
LOGO29  OSHW-LOGOS  [OSHW-LOGO-S]  101.09,110.49 0 bottom
LOGO30  LOGO-SFENEW  [SFE-NEW-WEBLOGO]  113.54,86.49 0 bottom
LOGO31  OSHW-LOGOS  [OSHW-LOGO-S]  139.19,110.49 0 bottom
LOGO32  LOGO-SFENEW  [SFE-NEW-WEBLOGO]  151.64,86.49 0 bottom
LOGO33  OSHW-LOGOS  [OSHW-LOGO-S]  177.29,110.49 0 bottom
LOGO34  LOGO-SFENEW  [SFE-NEW-WEBLOGO]  189.74,86.49 0 bottom
LOGO35  OSHW-LOGOS  [OSHW-LOGO-S]  215.39,110.49 0 bottom
LOGO36  LOGO-SFENEW  [SFE-NEW-WEBLOGO]  227.84,86.49 0 bottom
R1  0.3  [0805]  20.7,27.81 270 top
R2  0.3  [0805]  29.34,27.81 270 top
R3  0.3  [0805]  37.97,27.81 270 top
R4  0.3  [0805]  19.18,27.81 90 top
R5  0.3  [0805]  27.81,27.81 90 top
R6  0.3  [0805]  36.45,27.81 90 top
R7  0.3  [0805]  67.44,27.81 270 top
R8  0.3  [0805]  58.8,27.81 270 top
R9  0.3  [0805]  76.07,27.81 270 top
R10  0.3  [0805]  57.28,27.81 90 top
R11  0.3  [0805]  65.91,27.81 90 top
R12  0.3  [0805]  74.55,27.81 90 top
R13  0.3  [0805]  105.54,27.81 270 top
R14  0.3  [0805]  96.9,27.81 270 top
R15  0.3  [0805]  114.17,27.81 270 top
R16  0.3  [0805]  95.38,27.81 90 top
R17  0.3  [0805]  104.01,27.81 90 top
R18  0.3  [0805]  112.65,27.81 90 top
R19  0.3  [0805]  143.64,27.81 270 top
R20  0.3  [0805]  135,27.81 270 top
R21  0.3  [0805]  152.27,27.81 270 top
R22  0.3  [0805]  133.48,27.81 90 top
R23  0.3  [0805]  142.11,27.81 90 top
R24  0.3  [0805]  150.75,27.81 90 top
R25  0.3  [0805]  181.74,27.81 270 top
R26  0.3  [0805]  173.1,27.81 270 top
R27  0.3  [0805]  190.37,27.81 270 top
R28  0.3  [0805]  171.58,27.81 90 top
R29  0.3  [0805]  180.21,27.81 90 top
R30  0.3  [0805]  188.85,27.81 90 top
R31  0.3  [0805]  219.84,27.81 270 top
R32  0.3  [0805]  211.2,27.81 270 top
R33  0.3  [0805]  228.47,27.81 270 top
R34  0.3  [0805]  209.68,27.81 90 top
R35  0.3  [0805]  218.31,27.81 90 top
R36  0.3  [0805]  226.95,27.81 90 top
R37  0.3  [0805]  29.34,65.66 270 top
R38  0.3  [0805]  20.7,65.66 270 top
R39  0.3  [0805]  37.97,65.66 270 top
R40  0.3  [0805]  19.18,65.66 90 top
R41  0.3  [0805]  27.81,65.66 90 top
R42  0.3  [0805]  36.45,65.66 90 top
R43  0.3  [0805]  67.44,65.66 270 top
R44  0.3  [0805]  58.8,65.66 270 top
R45  0.3  [0805]  76.07,65.66 270 top
R46  0.3  [0805]  57.28,65.66 90 top
R47  0.3  [0805]  65.91,65.66 90 top
R48  0.3  [0805]  74.55,65.66 90 top
R49  0.3  [0805]  105.54,65.66 270 top
R50  0.3  [0805]  96.9,65.66 270 top
R51  0.3  [0805]  114.17,65.66 270 top
R52  0.3  [0805]  95.38,65.66 90 top
R53  0.3  [0805]  104.01,65.66 90 top
R54  0.3  [0805]  112.65,65.66 90 top
R55  0.3  [0805]  143.64,65.66 270 top
R56  0.3  [0805]  135,65.66 270 top
R57  0.3  [0805]  152.27,65.66 270 top
R58  0.3  [0805]  133.48,65.66 90 top
R59  0.3  [0805]  142.11,65.66 90 top
R60  0.3  [0805]  150.75,65.66 90 top
R61  0.3  [0805]  181.74,65.66 270 top
R62  0.3  [0805]  173.1,65.66 270 top
R63  0.3  [0805]  190.37,65.66 270 top
R64  0.3  [0805]  171.58,65.66 90 top
R65  0.3  [0805]  180.21,65.66 90 top
R66  0.3  [0805]  188.85,65.66 90 top
R67  0.3  [0805]  219.84,65.66 270 top
R68  0.3  [0805]  211.2,65.66 270 top
R69  0.3  [0805]  228.47,65.66 270 top
R70  0.3  [0805]  209.68,65.66 90 top
R71  0.3  [0805]  218.31,65.66 90 top
R72  0.3  [0805]  226.95,65.66 90 top
R73  0.3  [0805]  29.34,103.5 270 top
R74  0.3  [0805]  20.7,103.5 270 top
R75  0.3  [0805]  37.97,103.5 270 top
R76  0.3  [0805]  19.18,103.5 90 top
R77  0.3  [0805]  27.81,103.5 90 top
R78  0.3  [0805]  36.45,103.5 90 top
R79  0.3  [0805]  67.44,103.5 270 top
R80  0.3  [0805]  58.8,103.5 270 top
R81  0.3  [0805]  76.07,103.5 270 top
R82  0.3  [0805]  57.28,103.5 90 top
R83  0.3  [0805]  65.91,103.5 90 top
R84  0.3  [0805]  74.55,103.5 90 top
R85  0.3  [0805]  105.54,103.5 270 top
R86  0.3  [0805]  96.9,103.5 270 top
R87  0.3  [0805]  114.17,103.5 270 top
R88  0.3  [0805]  95.38,103.5 90 top
R89  0.3  [0805]  104.01,103.5 90 top
R90  0.3  [0805]  112.65,103.5 90 top
R91  0.3  [0805]  143.64,103.5 270 top
R92  0.3  [0805]  135,103.5 270 top
R93  0.3  [0805]  152.27,103.5 270 top
R94  0.3  [0805]  133.48,103.5 90 top
R95  0.3  [0805]  142.11,103.5 90 top
R96  0.3  [0805]  150.75,103.5 90 top
R97  0.3  [0805]  181.74,103.5 270 top
R98  0.3  [0805]  173.1,103.5 270 top
R99  0.3  [0805]  190.37,103.5 270 top
R100  0.3  [0805]  171.58,103.5 90 top
R101  0.3  [0805]  180.21,103.5 90 top
R102  0.3  [0805]  188.85,103.5 90 top
R103  0.3  [0805]  219.84,103.5 270 top
R104  0.3  [0805]  211.2,103.5 270 top
R105  0.3  [0805]  228.47,103.5 270 top
R106  0.3  [0805]  209.68,103.5 90 top
R107  0.3  [0805]  218.31,103.5 90 top
R108  0.3  [0805]  226.95,103.5 90 top
SJ1  JUMPER-PAD-2-NO  [PAD-JUMPER-2-NO_NO_SILK]  17.53,28.45 0 top
SJ2  JUMPER-PAD-2-NO  [PAD-JUMPER-2-NO_NO_SILK]  26.16,28.45 0 top
SJ3  JUMPER-PAD-2-NO  [PAD-JUMPER-2-NO_NO_SILK]  34.8,28.45 0 top
SJ4  JUMPER-PAD-2-NO  [PAD-JUMPER-2-NO_NO_SILK]  55.63,28.45 0 top
SJ5  JUMPER-PAD-2-NO  [PAD-JUMPER-2-NO_NO_SILK]  64.26,28.45 0 top
SJ6  JUMPER-PAD-2-NO  [PAD-JUMPER-2-NO_NO_SILK]  72.9,28.45 0 top
SJ7  JUMPER-PAD-2-NO  [PAD-JUMPER-2-NO_NO_SILK]  93.73,28.45 0 top
SJ8  JUMPER-PAD-2-NO  [PAD-JUMPER-2-NO_NO_SILK]  102.36,28.45 0 top
SJ9  JUMPER-PAD-2-NO  [PAD-JUMPER-2-NO_NO_SILK]  111,28.45 0 top
SJ10  JUMPER-PAD-2-NO  [PAD-JUMPER-2-NO_NO_SILK]  131.83,28.45 0 top
SJ11  JUMPER-PAD-2-NO  [PAD-JUMPER-2-NO_NO_SILK]  140.46,28.45 0 top
SJ12  JUMPER-PAD-2-NO  [PAD-JUMPER-2-NO_NO_SILK]  149.1,28.45 0 top
SJ13  JUMPER-PAD-2-NO  [PAD-JUMPER-2-NO_NO_SILK]  169.93,28.45 0 top
SJ14  JUMPER-PAD-2-NO  [PAD-JUMPER-2-NO_NO_SILK]  178.56,28.45 0 top
SJ15  JUMPER-PAD-2-NO  [PAD-JUMPER-2-NO_NO_SILK]  187.2,28.45 0 top
SJ16  JUMPER-PAD-2-NO  [PAD-JUMPER-2-NO_NO_SILK]  208.03,28.45 0 top
SJ17  JUMPER-PAD-2-NO  [PAD-JUMPER-2-NO_NO_SILK]  216.66,28.45 0 top
SJ18  JUMPER-PAD-2-NO  [PAD-JUMPER-2-NO_NO_SILK]  225.3,28.45 0 top
SJ19  JUMPER-PAD-2-NO  [PAD-JUMPER-2-NO_NO_SILK]  17.53,66.29 0 top
SJ20  JUMPER-PAD-2-NO  [PAD-JUMPER-2-NO_NO_SILK]  26.16,66.29 0 top
SJ21  JUMPER-PAD-2-NO  [PAD-JUMPER-2-NO_NO_SILK]  34.8,66.29 0 top
SJ22  JUMPER-PAD-2-NO  [PAD-JUMPER-2-NO_NO_SILK]  55.63,66.29 0 top
SJ23  JUMPER-PAD-2-NO  [PAD-JUMPER-2-NO_NO_SILK]  64.26,66.29 0 top
SJ24  JUMPER-PAD-2-NO  [PAD-JUMPER-2-NO_NO_SILK]  72.9,66.29 0 top
SJ25  JUMPER-PAD-2-NO  [PAD-JUMPER-2-NO_NO_SILK]  93.73,66.29 0 top
SJ26  JUMPER-PAD-2-NO  [PAD-JUMPER-2-NO_NO_SILK]  102.36,66.29 0 top
SJ27  JUMPER-PAD-2-NO  [PAD-JUMPER-2-NO_NO_SILK]  111,66.29 0 top
SJ28  JUMPER-PAD-2-NO  [PAD-JUMPER-2-NO_NO_SILK]  131.83,66.29 0 top
SJ29  JUMPER-PAD-2-NO  [PAD-JUMPER-2-NO_NO_SILK]  140.46,66.29 0 top
SJ30  JUMPER-PAD-2-NO  [PAD-JUMPER-2-NO_NO_SILK]  149.1,66.29 0 top
SJ31  JUMPER-PAD-2-NO  [PAD-JUMPER-2-NO_NO_SILK]  169.93,66.29 0 top
SJ32  JUMPER-PAD-2-NO  [PAD-JUMPER-2-NO_NO_SILK]  178.56,66.29 0 top
SJ33  JUMPER-PAD-2-NO  [PAD-JUMPER-2-NO_NO_SILK]  187.2,66.29 0 top
SJ34  JUMPER-PAD-2-NO  [PAD-JUMPER-2-NO_NO_SILK]  208.03,66.29 0 top
SJ35  JUMPER-PAD-2-NO  [PAD-JUMPER-2-NO_NO_SILK]  216.66,66.29 0 top
SJ36  JUMPER-PAD-2-NO  [PAD-JUMPER-2-NO_NO_SILK]  225.3,66.29 0 top
SJ37  JUMPER-PAD-2-NO  [PAD-JUMPER-2-NO_NO_SILK]  17.53,104.14 0 top
SJ38  JUMPER-PAD-2-NO  [PAD-JUMPER-2-NO_NO_SILK]  26.16,104.14 0 top
SJ39  JUMPER-PAD-2-NO  [PAD-JUMPER-2-NO_NO_SILK]  34.8,104.14 0 top
SJ40  JUMPER-PAD-2-NO  [PAD-JUMPER-2-NO_NO_SILK]  55.63,104.14 0 top
SJ41  JUMPER-PAD-2-NO  [PAD-JUMPER-2-NO_NO_SILK]  64.26,104.14 0 top
SJ42  JUMPER-PAD-2-NO  [PAD-JUMPER-2-NO_NO_SILK]  72.9,104.14 0 top
SJ43  JUMPER-PAD-2-NO  [PAD-JUMPER-2-NO_NO_SILK]  93.73,104.14 0 top
SJ44  JUMPER-PAD-2-NO  [PAD-JUMPER-2-NO_NO_SILK]  102.36,104.14 0 top
SJ45  JUMPER-PAD-2-NO  [PAD-JUMPER-2-NO_NO_SILK]  111,104.14 0 top
SJ46  JUMPER-PAD-2-NO  [PAD-JUMPER-2-NO_NO_SILK]  131.83,104.14 0 top
SJ47  JUMPER-PAD-2-NO  [PAD-JUMPER-2-NO_NO_SILK]  140.46,104.14 0 top
SJ48  JUMPER-PAD-2-NO  [PAD-JUMPER-2-NO_NO_SILK]  149.1,104.14 0 top
SJ49  JUMPER-PAD-2-NO  [PAD-JUMPER-2-NO_NO_SILK]  169.93,104.14 0 top
SJ50  JUMPER-PAD-2-NO  [PAD-JUMPER-2-NO_NO_SILK]  178.56,104.14 0 top
SJ51  JUMPER-PAD-2-NO  [PAD-JUMPER-2-NO_NO_SILK]  187.2,104.14 0 top
SJ52  JUMPER-PAD-2-NO  [PAD-JUMPER-2-NO_NO_SILK]  208.03,104.14 0 top
SJ53  JUMPER-PAD-2-NO  [PAD-JUMPER-2-NO_NO_SILK]  216.66,104.14 0 top
SJ54  JUMPER-PAD-2-NO  [PAD-JUMPER-2-NO_NO_SILK]  225.3,104.14 0 top
STANDOFF1  STAND-OFF  [STAND-OFF]  12.19,34.8 0 top
STANDOFF2  STAND-OFF  [STAND-OFF]  43.31,9.4 0 top
STANDOFF3  STAND-OFF  [STAND-OFF]  50.29,34.8 0 top
STANDOFF4  STAND-OFF  [STAND-OFF]  81.41,9.4 0 top
STANDOFF5  STAND-OFF  [STAND-OFF]  88.39,34.8 0 top
STANDOFF6  STAND-OFF  [STAND-OFF]  119.51,9.4 0 top
STANDOFF7  STAND-OFF  [STAND-OFF]  126.49,34.8 0 top
STANDOFF8  STAND-OFF  [STAND-OFF]  157.61,9.4 0 top
STANDOFF9  STAND-OFF  [STAND-OFF]  164.59,34.8 0 top
STANDOFF10  STAND-OFF  [STAND-OFF]  195.71,9.4 0 top
STANDOFF11  STAND-OFF  [STAND-OFF]  202.69,34.8 0 top
STANDOFF12  STAND-OFF  [STAND-OFF]  233.81,9.4 0 top
STANDOFF13  STAND-OFF  [STAND-OFF]  12.19,72.64 0 top
STANDOFF14  STAND-OFF  [STAND-OFF]  43.31,47.24 0 top
STANDOFF15  STAND-OFF  [STAND-OFF]  50.29,72.64 0 top
STANDOFF16  STAND-OFF  [STAND-OFF]  81.41,47.24 0 top
STANDOFF17  STAND-OFF  [STAND-OFF]  88.39,72.64 0 top
STANDOFF18  STAND-OFF  [STAND-OFF]  119.51,47.24 0 top
STANDOFF19  STAND-OFF  [STAND-OFF]  126.49,72.64 0 top
STANDOFF20  STAND-OFF  [STAND-OFF]  157.61,47.24 0 top
STANDOFF21  STAND-OFF  [STAND-OFF]  164.59,72.64 0 top
STANDOFF22  STAND-OFF  [STAND-OFF]  195.71,47.24 0 top
STANDOFF23  STAND-OFF  [STAND-OFF]  202.69,72.64 0 top
STANDOFF24  STAND-OFF  [STAND-OFF]  233.81,47.24 0 top
STANDOFF25  STAND-OFF  [STAND-OFF]  12.19,110.49 0 top
STANDOFF26  STAND-OFF  [STAND-OFF]  43.31,85.09 0 top
STANDOFF27  STAND-OFF  [STAND-OFF]  50.29,110.49 0 top
STANDOFF28  STAND-OFF  [STAND-OFF]  81.41,85.09 0 top
STANDOFF29  STAND-OFF  [STAND-OFF]  88.39,110.49 0 top
STANDOFF30  STAND-OFF  [STAND-OFF]  119.51,85.09 0 top
STANDOFF31  STAND-OFF  [STAND-OFF]  126.49,110.49 0 top
STANDOFF32  STAND-OFF  [STAND-OFF]  157.61,85.09 0 top
STANDOFF33  STAND-OFF  [STAND-OFF]  164.59,110.49 0 top
STANDOFF34  STAND-OFF  [STAND-OFF]  195.71,85.09 0 top
STANDOFF35  STAND-OFF  [STAND-OFF]  202.69,110.49 0 top
STANDOFF36  STAND-OFF  [STAND-OFF]  233.81,85.09 0 top
U1  AL8805WS  [SOT23-5]  19.68,24 0 top
U2  AL8805WS  [SOT23-5]  28.32,24 0 top
U3  AL8805WS  [SOT23-5]  36.96,24 0 top
U4  AL8805WS  [SOT23-5]  66.42,24 0 top
U5  AL8805WS  [SOT23-5]  57.78,24 0 top
U6  AL8805WS  [SOT23-5]  75.06,24 0 top
U7  AL8805WS  [SOT23-5]  104.52,24 0 top
U8  AL8805WS  [SOT23-5]  95.89,24 0 top
U9  AL8805WS  [SOT23-5]  113.16,24 0 top
U10  AL8805WS  [SOT23-5]  142.62,24 0 top
U11  AL8805WS  [SOT23-5]  133.99,24 0 top
U12  AL8805WS  [SOT23-5]  151.26,24 0 top
U13  AL8805WS  [SOT23-5]  180.72,24 0 top
U14  AL8805WS  [SOT23-5]  172.09,24 0 top
U15  AL8805WS  [SOT23-5]  189.36,24 0 top
U16  AL8805WS  [SOT23-5]  218.82,24 0 top
U17  AL8805WS  [SOT23-5]  210.19,24 0 top
U18  AL8805WS  [SOT23-5]  227.46,24 0 top
U19  AL8805WS  [SOT23-5]  28.32,61.85 0 top
U20  AL8805WS  [SOT23-5]  19.68,61.85 0 top
U21  AL8805WS  [SOT23-5]  36.96,61.85 0 top
U22  AL8805WS  [SOT23-5]  66.42,61.85 0 top
U23  AL8805WS  [SOT23-5]  57.78,61.85 0 top
U24  AL8805WS  [SOT23-5]  75.06,61.85 0 top
U25  AL8805WS  [SOT23-5]  104.52,61.85 0 top
U26  AL8805WS  [SOT23-5]  95.89,61.85 0 top
U27  AL8805WS  [SOT23-5]  113.16,61.85 0 top
U28  AL8805WS  [SOT23-5]  142.62,61.85 0 top
U29  AL8805WS  [SOT23-5]  133.99,61.85 0 top
U30  AL8805WS  [SOT23-5]  151.26,61.85 0 top
U31  AL8805WS  [SOT23-5]  180.72,61.85 0 top
U32  AL8805WS  [SOT23-5]  172.09,61.85 0 top
U33  AL8805WS  [SOT23-5]  189.36,61.85 0 top
U34  AL8805WS  [SOT23-5]  218.82,61.85 0 top
U35  AL8805WS  [SOT23-5]  210.19,61.85 0 top
U36  AL8805WS  [SOT23-5]  227.46,61.85 0 top
U37  AL8805WS  [SOT23-5]  28.32,99.69 0 top
U38  AL8805WS  [SOT23-5]  19.68,99.69 0 top
U39  AL8805WS  [SOT23-5]  36.96,99.69 0 top
U40  AL8805WS  [SOT23-5]  66.42,99.69 0 top
U41  AL8805WS  [SOT23-5]  57.78,99.69 0 top
U42  AL8805WS  [SOT23-5]  75.06,99.69 0 top
U43  AL8805WS  [SOT23-5]  104.52,99.69 0 top
U44  AL8805WS  [SOT23-5]  95.89,99.69 0 top
U45  AL8805WS  [SOT23-5]  113.16,99.69 0 top
U46  AL8805WS  [SOT23-5]  142.62,99.69 0 top
U47  AL8805WS  [SOT23-5]  133.99,99.69 0 top
U48  AL8805WS  [SOT23-5]  151.26,99.69 0 top
U49  AL8805WS  [SOT23-5]  180.72,99.69 0 top
U50  AL8805WS  [SOT23-5]  172.09,99.69 0 top
U51  AL8805WS  [SOT23-5]  189.36,99.69 0 top
U52  AL8805WS  [SOT23-5]  218.82,99.69 0 top
U53  AL8805WS  [SOT23-5]  210.19,99.69 0 top
U54  AL8805WS  [SOT23-5]  227.46,99.69 0 top

## Library data of the parts
C1 C3 C5 C7 C9 C12 C13 C15 C18 C19 C21 C24 C25 C27 C30 C31 C33 C36 C37 C39 C42 C43 C45 C48 C49 C51 C54 C55 C57 C60 C61 C63 C66 C67 C69 C72 C73 C75 C78 C79 C81 C84 C85 C87 C90 C91 C93 C96 C97 C99 C102 C103 C105 C108 = SparkFun-Capacitors; PROD_ID: CAP-11625
C2 C4 C6 C8 C10 C11 C14 C16 C17 C20 C22 C23 C26 C28 C29 C32 C34 C35 C38 C40 C41 C44 C46 C47 C50 C52 C53 C56 C58 C59 C62 C64 C65 C68 C70 C71 C74 C76 C77 C80 C82 C83 C86 C88 C89 C92 C94 C95 C98 C100 C101 C104 C106 C107 = SparkFun-Capacitors; PROD_ID: CAP-11624
D1-D54 = SparkFun-DiscreteSemi; PROD_ID: DIO-08053
E$1 = SparkFun-Retired
E$9 E$10 FID1-FID36 LOGO1-LOGO36 = SparkFun-Aesthetics
JP1-JP3 JP6-JP10 JP13-JP16 JP19-JP22 JP25-JP28 JP31-JP34 JP37-JP40 JP43-JP46 JP49-JP52 JP55-JP58 JP61-JP64 JP67-JP70 JP73-JP76 JP79-JP82 JP85-JP88 JP91-JP94 JP97-JP100 JP103-JP106 = SparkFun
JP4 JP5 JP11 JP12 JP17 JP18 JP23 JP24 JP29 JP30 JP35 JP36 JP41 JP42 JP47 JP48 JP53 JP54 JP59 JP60 JP65 JP66 JP71 JP72 JP77 JP78 JP83 JP84 JP89 JP90 JP95 JP96 JP101 JP102 JP107 JP108 = SparkFun-Connectors
L1-L54 = SparkFun-Passives; PROD_ID: NDUC-11627
R1-R108 = SparkFun-Resistors; PROD_ID: RES-11622
SJ1-SJ54 = SparkFun-Passives
STANDOFF1-STANDOFF36 = SparkFun-Electromechanical
U1-U54 = SparkFun-PowerIC; PROD_ID: IC-11626